# Altium PCB FortRotorV2.1.PcbDoc
Units mm, origin at the board's own origin, x right, y up, seen from the top; angles counter-clockwise.
Board outline 106.31 x 106.31 mm, 2 copper layers (Top Layer, Bottom Layer); 83 components, 69 nets, 283 pads, 174 vias.
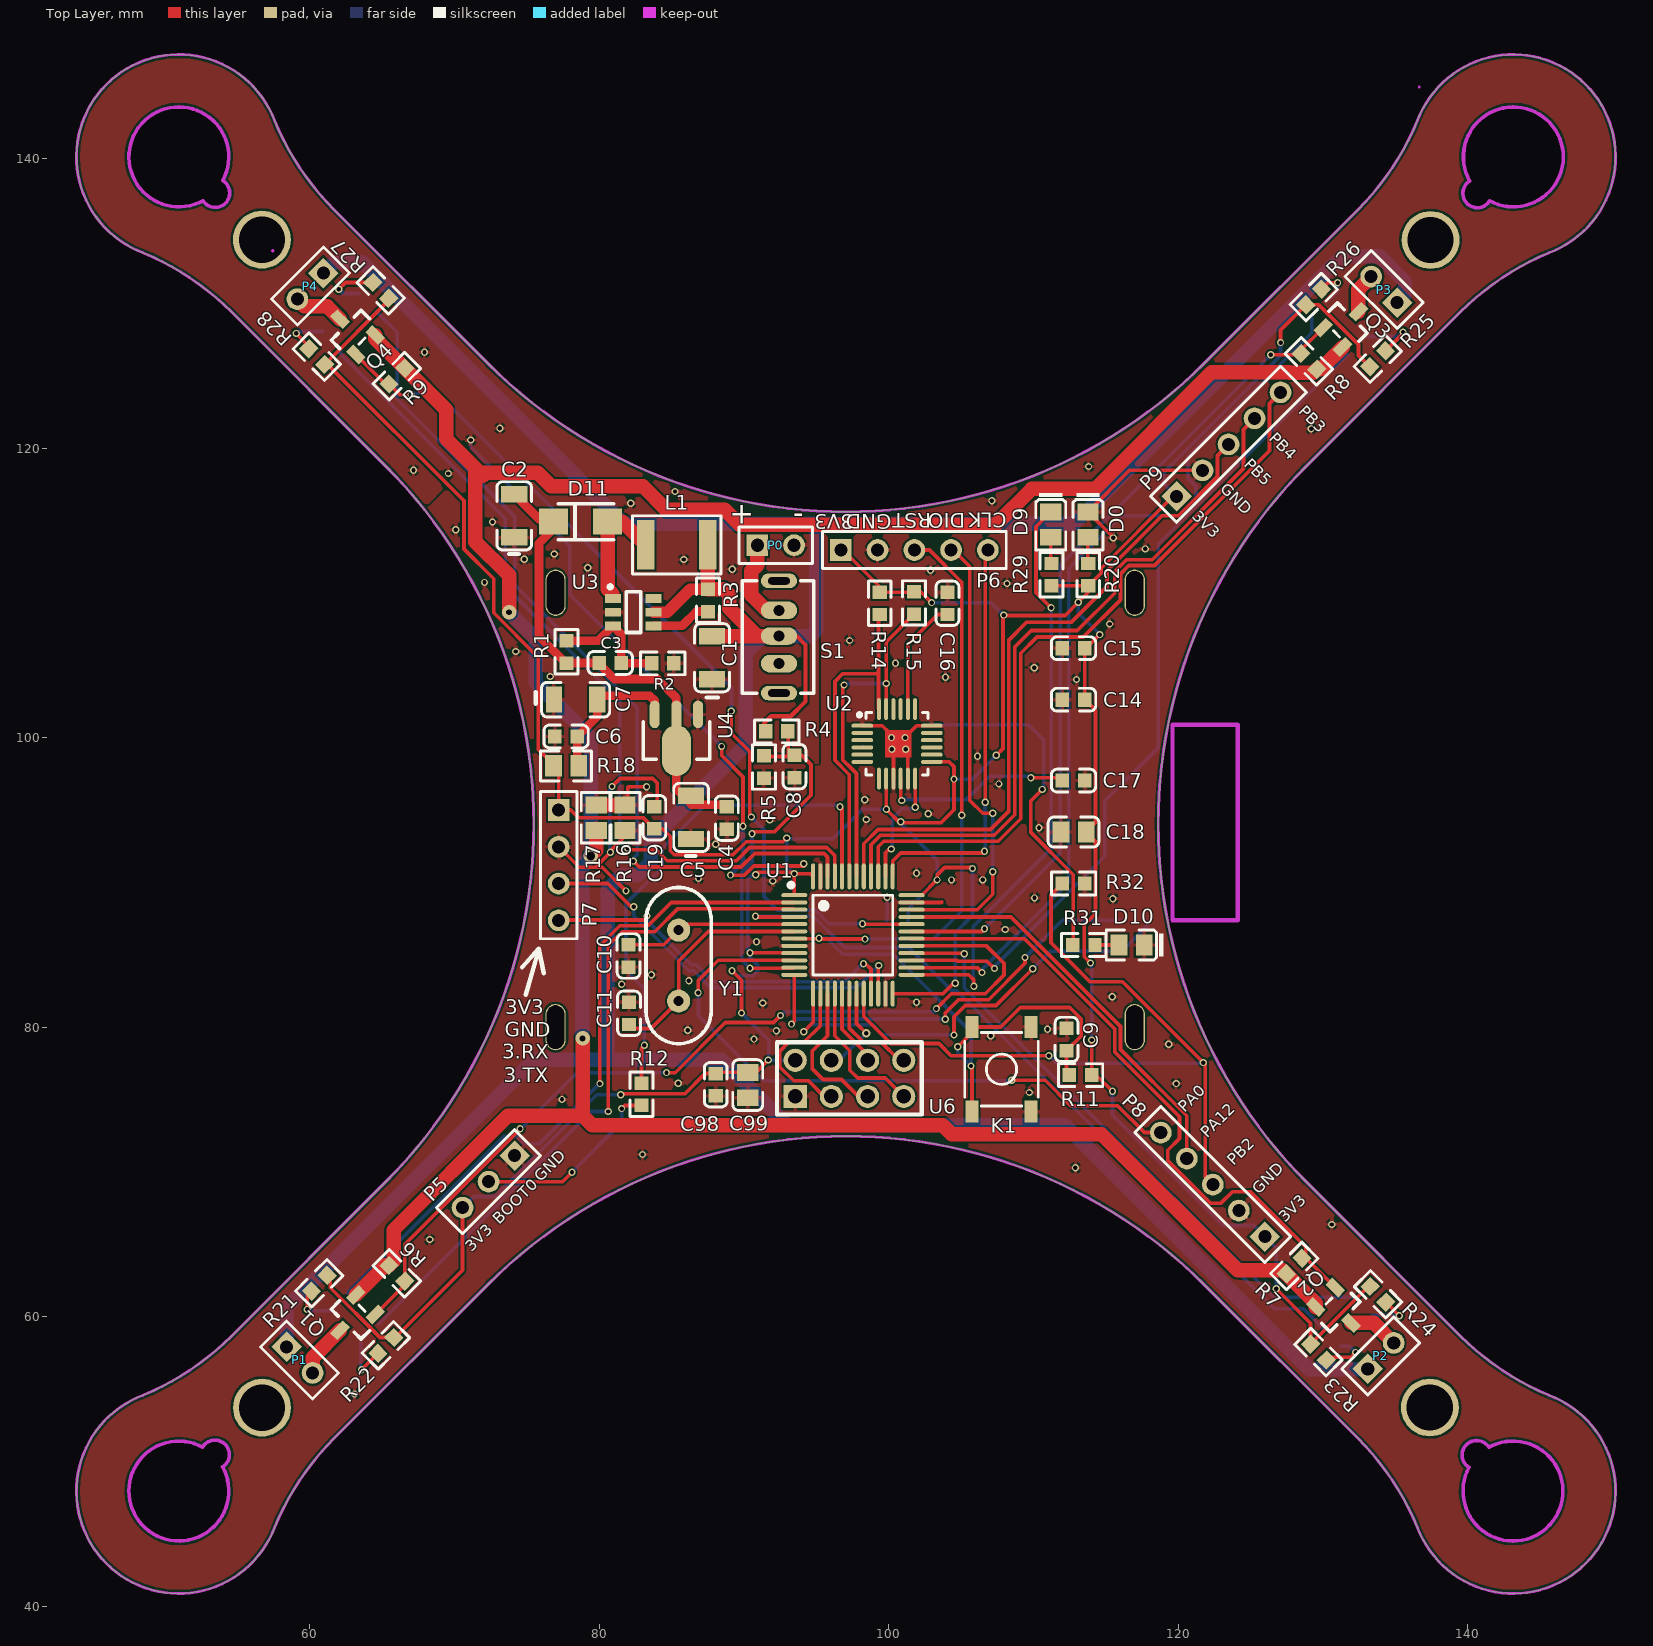
[diagram p0: Top Layer view]
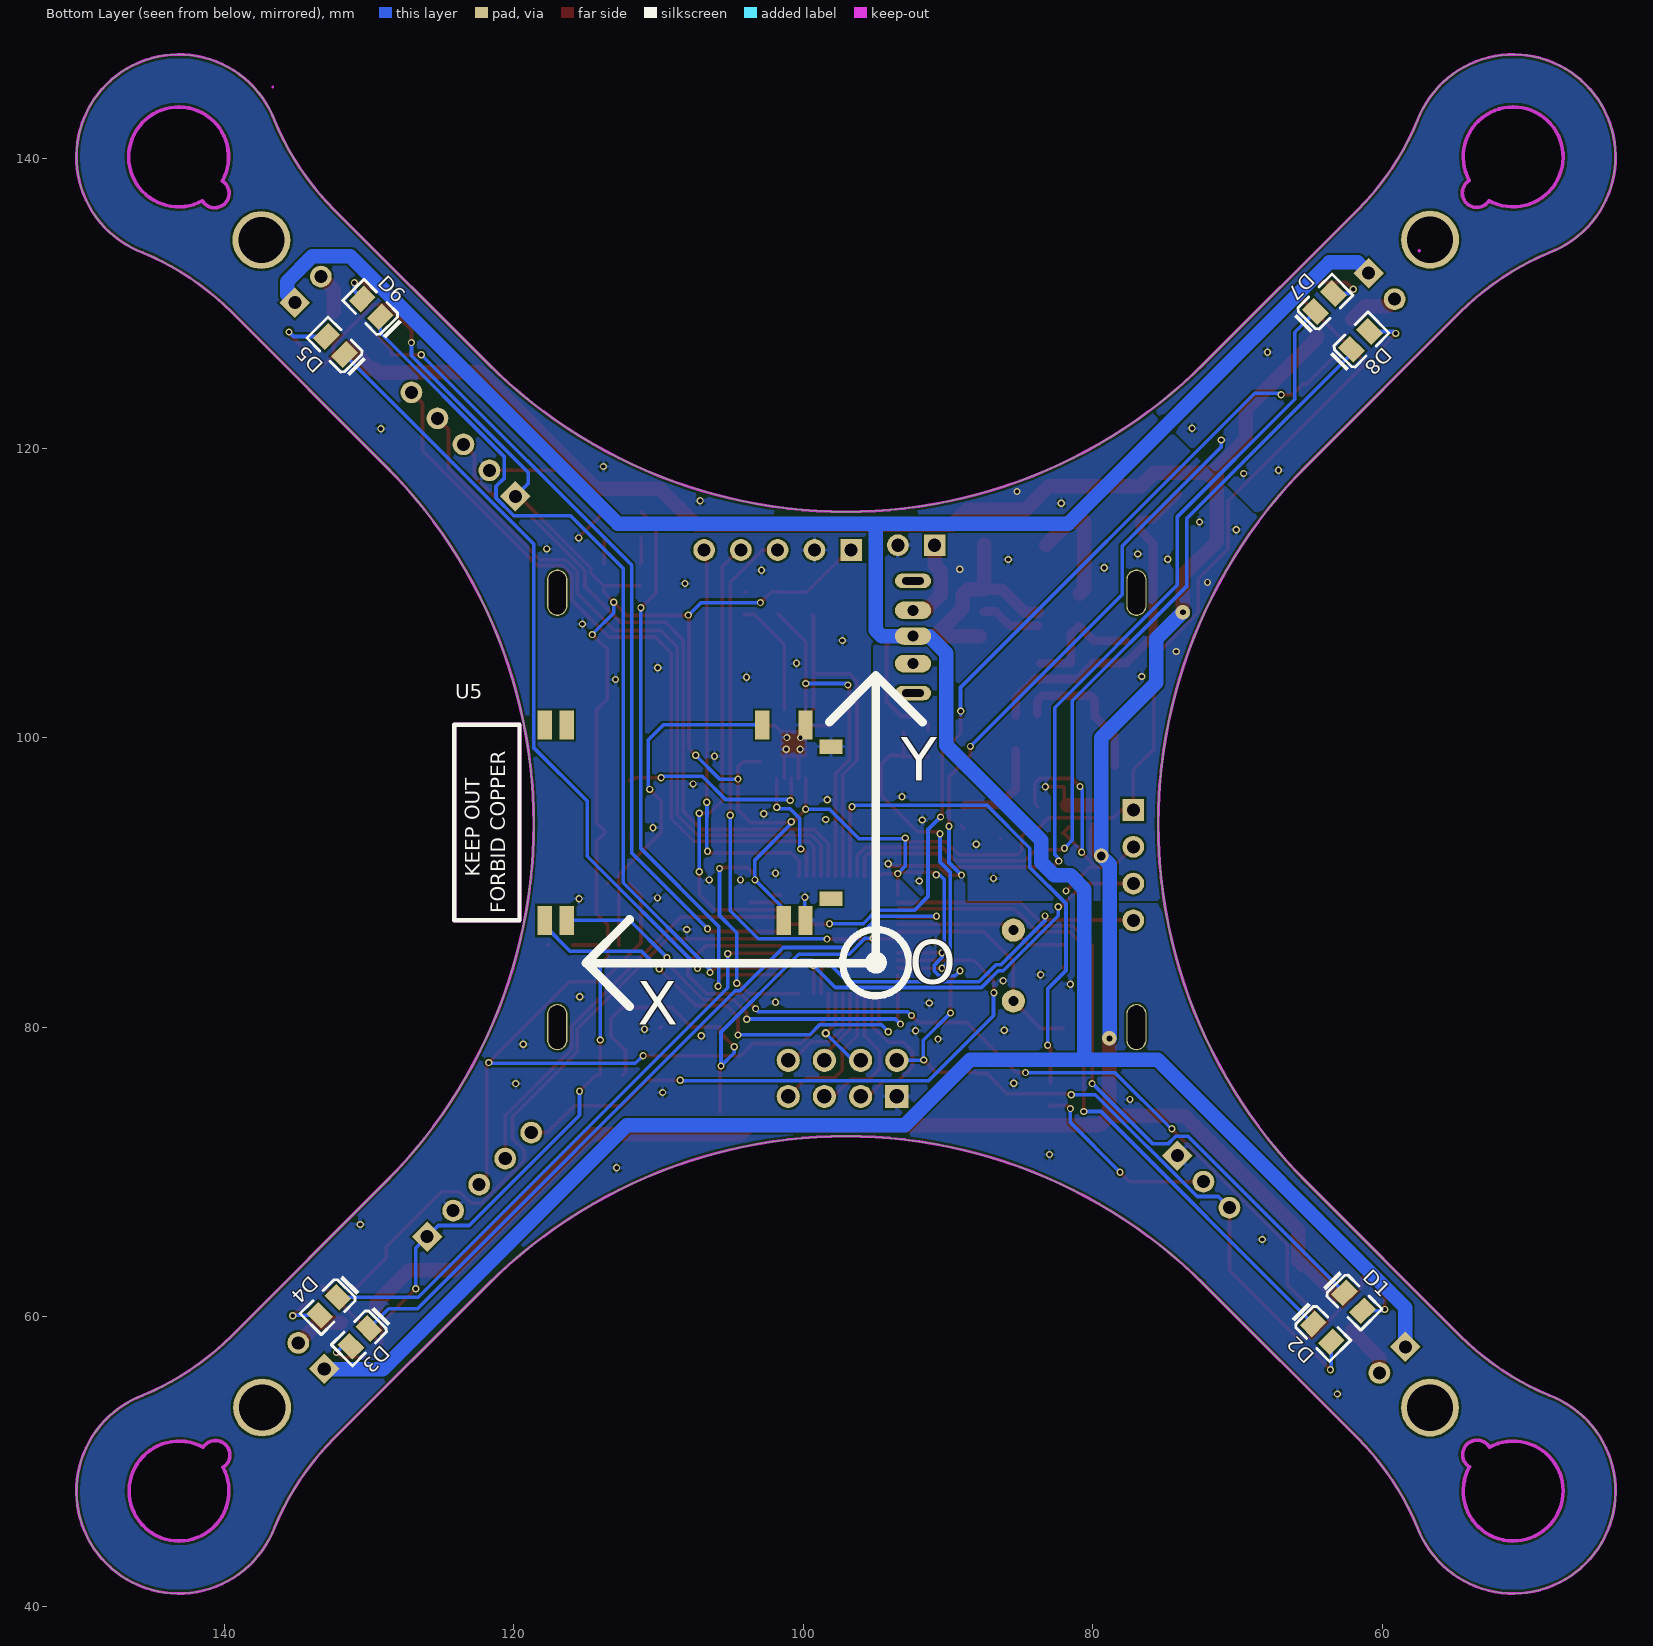
[diagram p1: Bottom Layer view, seen from below]
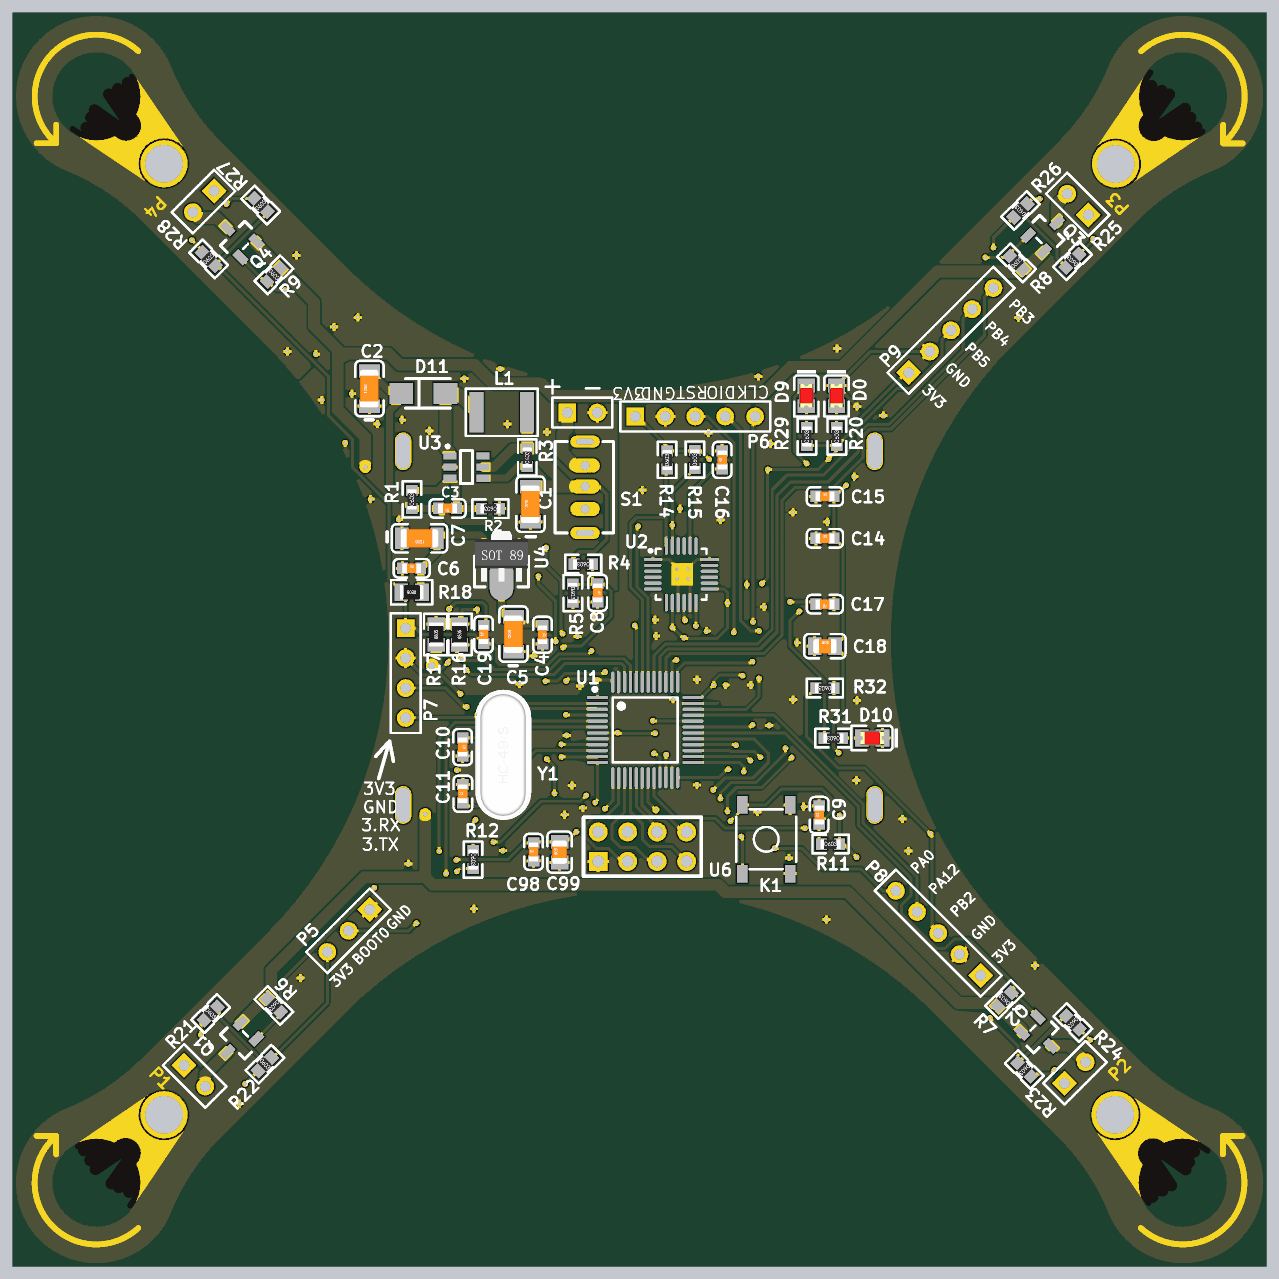
[diagram p2: 3D render of the assembled board from above, using the file's embedded part models]
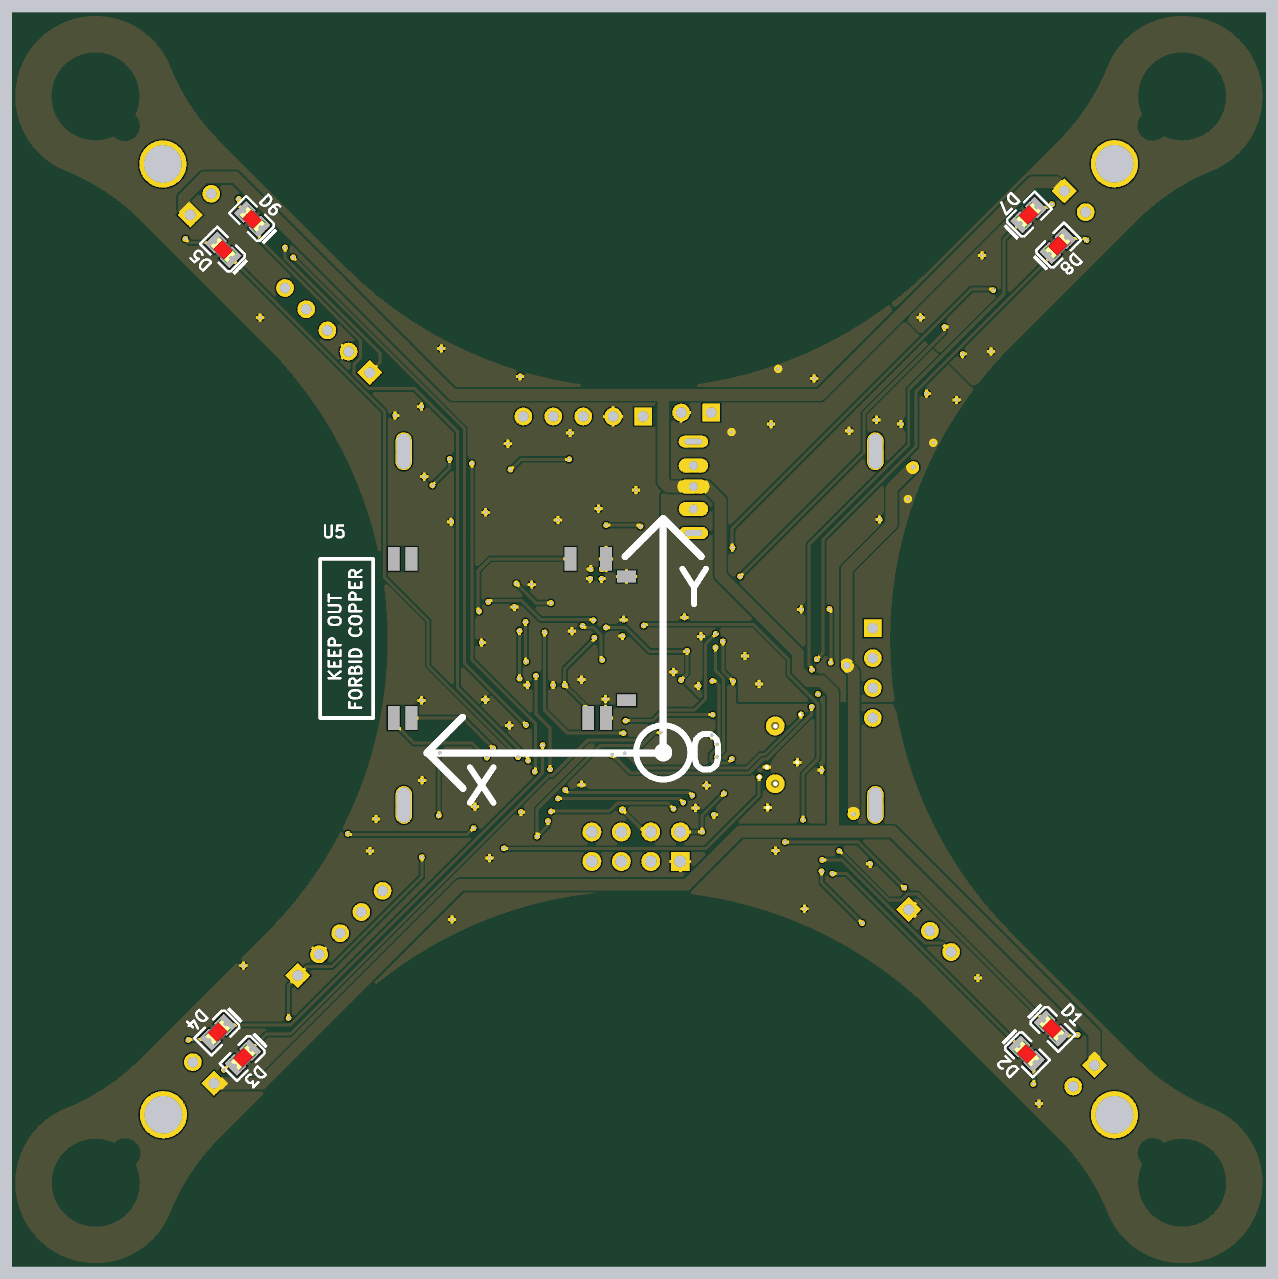
[diagram p3: 3D render of the assembled board from below, using the file's embedded part models]

## Layer stack, top to bottom
Top Layer: signal copper 0.0356
Dielectric: dielectric 0.32, FR-4, Dk 4.8
Bottom Layer: signal copper 0.0356

## Board outline
45.975,42.946 ccw(c50.975,47.946) 57.593,45.455 57.592,45.456 cw(c75.139,38.168) 61.704,51.603 72.31,62.21 cw(c97.059,37.461) 121.808,62.21 132.414,51.603 cw(c118.979,38.168) 136.525,45.458 136.524,45.457 ccw(c143.143,47.946) 148.143,42.946 ccw(c143.143,47.946) 145.633,54.564 145.632,54.562 cw(c152.92,72.109) 139.485,58.674 128.879,69.281 cw(c153.627,94.029) 128.879,118.778 139.485,129.385 cw(c152.92,115.95) 145.63,133.496 145.631,133.494 ccw(c143.143,140.113) 148.143,145.113 ccw(c143.143,140.113) 136.525,142.603 136.526,142.603 cw(c118.979,149.891) 132.414,136.456 121.808,125.849 cw(c97.059,150.598) 72.31,125.849 61.704,136.456 cw(c75.139,149.891) 57.593,142.601 57.594,142.601 ccw(c50.975,140.113) 45.975,145.113 ccw(c50.975,140.113) 48.485,133.495 48.485,133.496 cw(c41.197,115.95) 54.632,129.385 65.239,118.778 cw(c40.49,94.029) 65.239,69.281 54.632,58.674 cw(c41.197,72.109) 48.487,54.563 48.487,54.564 ccw(c50.975,47.946)
cut-out: 52.62,50.989 ccw(c50.978,47.955) 53.995,49.628 53.998,49.623 ccw(c53.467,50.47)
cut-out: 140.092,49.592 cw(c140.614,50.444) 141.462,50.976 141.46,50.974 cw(c143.129,47.955)
cut-out: 52.647,137.087 cw(c50.978,140.106) 54.014,138.468 54.015,138.47 cw(c53.492,137.617)
cut-out: 140.134,138.439 ccw(c140.665,137.592) 141.518,137.069 141.516,137.07 ccw(c143.154,140.106)

## Design rules (kind name [scope] priority, off if disabled: settings)
Clearance [All] p1: gap=0.152
HoleSize [All] p1: absolutevalues=TRUE maxlimit=10 minlimit=0.3 maxpercent=80.000 minpercent=20.000
MinimumSolderMaskSliver [All] p1: minsoldermaskwidth=0.1
PlaneConnect [All] p1: planeconnectstyle=Direct reliefexpansion=0.508 reliefentries=4 reliefconductorwidth=0.254 reliefairgap=0.254
PolygonConnect [All] p1: connectstyle=Relief reliefconductorwidth=0.254 reliefentries=4 polygonreliefangle="90 Angle"
RoutingVias [All] p1: holewidth=0.3 width=0.5 viastyle="Through Hole" minholewidth=0.3 minwidth=0.5 maxholewidth=0.711 maxwidth=1.27
SilkToSilkClearance [All] p1: silktosilkclearance=0
SilkscreenOverComponentPads [All] p1: minsilkscreentomaskgap=0
SolderMaskExpansion [All] p1: expansion=0.102
TestPointUsage [All] p1: valid=0 allowmultiple=FALSE
Testpoint [All] p1: side=15 testpointundercomponent=TRUE minsize=1.016 maxsize=2.54 preferedsize=1.524 minholesize=0 maxholesize=1.016 preferedholesize=0.813 testpointgrid=0.025 style=1023 order=0123456789
Width [All] p1: maxlimit=5.08 minlimit=0.152 preferedwidth=0.254
19 further rules are at their usual default settings.

## Components (designator, comment, footprint, x,y, rotation, side; value= is the part's Value field where it differs from the comment)
C1 "Cap Pol1" LC-1206_C 87.808,105.512 r270 top
C2 "Cap Pol1" LC-1206_C 74.143,115.316 r270 top
C3 "Cap" LC-0603_C 80.772,105.156 r180 top
C4 "Cap" LC-0603_C 88.824,94.437 r90 top
C5 "Cap Pol1" LC-1206_C 86.36,94.488 r270 top
C6 "Cap" LC-0603_C 77.724,100.076 r0 top
C7 "Cap Pol1" LC-1206_C 78.384,102.616 r180 top
C8 "Cap" LC-0603_C 93.497,97.993 r90 top
C9 "1uF" LC-0603_C 112.293,79.146 r270 top
C10 "" LC-0603_C 82.042,84.912 r90 top
C11 "" LC-0603_C 82.067,80.95 r270 top
C14 "" LC-0603_C 112.776,102.616 r0 top
C15 "" LC-0603_C 112.776,106.172 r0 top
C16 "" LC-0603_C 104.064,109.271 r270 top
C17 "" LC-0603_C 112.776,97.028 r180 top
C18 "" LC-0805_C 112.776,93.472 r0 top
C19 "" LC-0603_C 83.82,94.463 r270 top
C98 "1uF" LC-0603_C 88.062,76.022 r270 top
C99 "1uF" LC-0805_C 90.272,75.997 r270 top
D0 "LED0" LC-0805_LED_S1 113.767,114.706 r270 top
D1 "LED0" LC-0805_LED_S1 62.008,61.037 r225 bottom
D2 "LED0" LC-0805_LED_S1 64.163,58.882 r225 bottom
D3 "LED0" LC-0805_LED_S1 130.636,58.568 r315 bottom
D4 "LED0" LC-0805_LED_S1 132.792,60.723 r315 bottom
D5 "LED0" LC-0805_LED_S1 132.32,127.08 r45 bottom
D6 "LED0" LC-0805_LED_S1 129.853,129.678 r45 bottom
D7 "LED0" LC-0805_LED_S1 64.008,130.048 r135 bottom
D8 "LED0" LC-0805_LED_S1 61.519,127.432 r135 bottom
D9 "LED0" LC-0805_LED_S1 111.201,114.706 r270 top
D10 "LED0" LC-0805_LED_S1 116.789,85.674 r180 top
D11 "SS14" LC-DO-214AC 79.096,114.91 r0 top
K1 "SW-DPST" SWITCH2 109.703,74.168 r180 top
L1 "Inductor" LC-1812_L 85.369,113.309 r180 top
P0 "VBAT" HDR1X2 90.932,113.284 r0 top
P1 "M1" HDR1X2 58.42,57.912 r315 top
P2 "M2" HDR1X2 133.096,56.388 r45 top
P3 "M3" HDR1X2 135.128,130.048 r135 top
P4 "M4" HDR1X2 60.96,132.08 r225 top
P5 "BOOT" HDR1X3 74.168,71.12 r225 top
P6 "SWD" HDR1X5 96.698,112.954 r0 top
P7 "USART" HDR1X4 77.216,94.996 r270 top
P8 "Header 5" HDR1X5 125.984,65.532 r135 top
P9 "Header 5" HDR1X5 119.888,116.662 r45 top
Q1 "SI2302" LC-SOT-23(SOT-23-3) 62.992,59.944 r45 top
Q2 "SI2302" LC-SOT-23(SOT-23-3) 131.064,60.452 r135 top
Q3 "SI2302" LC-SOT-23(SOT-23-3) 131.572,128.524 r225 top
Q4 "SI2302" LC-SOT-23(SOT-23-3) 62.992,128.016 r315 top
R1 "Res2" LC-0603_R 77.749,105.918 r270 top
R2 "Res2" LC-0603_R 84.404,105.131 r180 top
R3 "Res2" LC-0603_R 87.528,109.474 r270 top
R4 "Res2" LC-0603_R 92.278,100.432 r180 top
R5 "Res2" LC-0603_R 91.389,97.968 r90 top
R6 "" LC-0603_R 66.04,62.992 r135 top
R7 "" LC-0603_R 128.016,63.5 r225 top
R8 "" LC-0603_R 129.032,125.984 r315 top
R9 "" LC-0603_R 66.04,124.968 r45 top
R11 "10K" LC-0603_R 113.259,76.683 r0 top
R12 "" LC-0603_R 82.931,75.362 r90 top
R14 "" LC-0603_R 99.39,109.271 r270 top
R15 "" LC-0603_R 101.752,109.296 r270 top
R16 "" LC-0805_R 81.788,94.463 r270 top
R17 "" LC-0805_R 79.807,94.463 r270 top
R18 "" LC-0805_R 77.724,98.044 r180 top
R20 "" LC-0603_R 113.792,111.252 r270 top
R21 "" LC-0603_R 60.681,62.306 r45 top
R22 "" LC-0603_R 65.278,58.014 r45 top
R23 "" LC-0603_R 129.692,57.556 r135 top
R24 "" LC-0603_R 133.807,61.544 r135 top
R25 "" LC-0603_R 133.782,126.162 r225 top
R26 "" LC-0603_R 129.362,130.429 r225 top
R27 "" LC-0603_R 64.922,130.886 r315 top
R28 "" LC-0603_R 60.503,126.314 r315 top
R29 "" LC-0603_R 111.252,111.252 r270 top
R31 "" LC-0603_R 113.487,85.674 r180 top
R32 "" LC-0603_R 112.776,89.916 r180 top
S1 "SWITCH" SWITCH_6 92.431,110.82 r0 top
U1 "STM32F103C8T6" LC-LQFP-48_7x7x05P 97.536,86.36 r270 top
U2 "MPU6050" LC-QFN-24_4X4X05P 100.584,99.568 r270 top
U3 "SX1308" LC-SOT-23-6 82.372,108.661 r180 top
U4 "HT7833" LC-SOT-89(SOT-89-3) 85.344,101.6 r90 top
U5 "SPP-C" SPP-C 117.856,87.376 r90 bottom
U6 "NRF24L01" LC-HDR2X4H 93.548,75.209 r90 top
Y1 "" LC-HC-49S 85.496,84.252 r270 top

## Footprints (in the part's own frame and the unit in brackets; to place one, negate y for a bottom-side part, rotate by r counter-clockwise, add the part's x,y. Pads: shape width x height; smd on the part's side, far side on the other; paste and mask are expansions set on the pad)
HDR1X2 [mm] "Connector; Header; 2 Position"
  rect 1.5x1.5 hole 0.9: 1(0,0)
  round 1.5 hole 0.9: 2(2.54,0)
  silkscreen extent -1.27,-1.27 3.81,1.27
HDR1X3 [mm] "Connector; Header; 3 Position"
  rect 1.5x1.5 hole 0.9: 1(0,0)
  round 1.5 hole 0.9: 2(2.54,0) 3(5.08,0)
  silkscreen extent -1.27,-1.27 6.35,1.27
HDR1X4 [mm] "Connector; Header; 4 Position"
  rect 1.5x1.5 hole 0.9: 1(0,0)
  round 1.5 hole 0.9: 2(2.54,0) 3(5.08,0) 4(7.62,0)
  silkscreen extent -1.27,-1.27 8.89,1.27
HDR1X5 [mm] "Connector; Header; 5 Position"
  rect 1.5x1.5 hole 0.9: 1(0,0)
  round 1.5 hole 0.9: 2(2.54,0) 3(5.08,0) 4(7.62,0) 5(10.16,0)
  silkscreen extent -1.27,-1.27 11.43,1.27
LC-0603_C [mm]
  rect 0.93x0.98 smd: 1(-0.77,0) 2(0.77,0)
  silkscreen extent -1.53,-0.79 1.54,0.79, body extent -0.8,-0.4 0.8,0.4, height 0.3
LC-0603_R [mm]
  rect 0.93x0.98 smd: 1(-0.77,0) 2(0.77,0)
  silkscreen extent -1.53,-0.79 1.54,0.79, body extent -0.85,-0.4 0.85,0.4, height 0.56
LC-0805_C [mm]
  rect 1.16x1.47 smd: 1(-0.875,0) 2(0.875,0)
  silkscreen extent -1.76,-1.04 1.76,1.04, body extent -1,-0.62 1,0.63, height 0.77
LC-0805_LED_S1 [mm]
  rect 1.16x1.47 smd: 1(0.875,0) 2(-0.875,0)
  silkscreen extent -2.2,-1.04 1.76,1.03, body extent -1.01,-0.62 1.01,0.62, height 1.1
LC-0805_R [mm]
  rect 1.16x1.47 smd: 1(-0.875,0) 2(0.875,0)
  silkscreen extent -1.76,-1.04 1.76,1.03, body extent -1,-0.62 1,0.63, height 0.49
LC-1206_C [mm]
  rect 1.13x1.8 smd: 1(-1.49,0) 2(1.49,0)
  silkscreen extent -2.36,-1.2 2.35,1.2, body extent -1.6,-0.81 1.6,0.79, height 1
LC-1812_L [mm]
  rect 1.2x3.42 smd: 1(-2.15,0) 2(2.15,0)
  silkscreen extent -3.05,-2.01 3.05,2.01
LC-DO-214AC [mm]
  rect 2x1.8 smd: 1(1.5,0) 2(-2.25,0)
  silkscreen extent -1.9,-1.25 1.9,1.25
LC-HC-49S [mm]
  round 1.6 hole 0.7: 1(-2.45,0) 2(2.45,0)
  silkscreen extent -5.39,-2.25 5.39,2.25, body extent -5.39,-2.27 5.41,2.23, height 3.6
LC-HDR2X4H [mm]
  rect 1.6x1.6 hole 1: 1(0,0)
  round 1.6 hole 1: 2(2.5,0) 3(0,-2.5) 4(2.5,-2.5) 5(0,-5) 6(2.5,-5) 7(0,-7.5) 8(2.5,-7.5)
  silkscreen extent -1.25,-8.75 3.75,1.25
LC-LQFP-48_7x7x05P [mm]
  oval 0.28x1.8 smd mask+0.051: 1(-2.75,-4.05) 2(-2.25,-4.05) 3(-1.75,-4.05) 4(-1.25,-4.05) 5(-0.75,-4.05) 6(-0.25,-4.05) 7(0.25,-4.05) 8(0.75,-4.05) 9(1.25,-4.05) 10(1.75,-4.05) 11(2.25,-4.05) 12(2.75,-4.05) 25(2.75,4.05) 26(2.25,4.05) 27(1.75,4.05) 28(1.25,4.05) 29(0.75,4.05) 30(0.25,4.05) 31(-0.25,4.05) 32(-0.75,4.05) 33(-1.25,4.05) 34(-1.75,4.05) 35(-2.25,4.05) 36(-2.75,4.05)
  oval 1.8x0.28 smd mask+0.051: 13(4.05,-2.75) 14(4.05,-2.25) 15(4.05,-1.75) 16(4.05,-1.25) 17(4.05,-0.75) 18(4.05,-0.25) 19(4.05,0.25) 20(4.05,0.75) 21(4.05,1.25) 22(4.05,1.75) 23(4.05,2.25) 24(4.05,2.75) 37(-4.05,2.75) 38(-4.05,2.25) 39(-4.05,1.75) 40(-4.05,1.25) 41(-4.05,0.75) 42(-4.05,0.25) 43(-4.05,-0.25) 44(-4.05,-0.75) 45(-4.05,-1.25) 46(-4.05,-1.75) 47(-4.05,-2.25) 48(-4.05,-2.75)
  silkscreen extent -3.6,-4.42 2.75,2.75
LC-QFN-24_4X4X05P [mm]
  oval 0.28x1.5 smd mask+0.051: 1(-1.25,-2.4) 2(-0.75,-2.4) 3(-0.25,-2.4) 4(0.25,-2.4) 5(0.75,-2.4) 6(1.25,-2.4) 13(1.25,2.4) 14(0.75,2.4) 15(0.25,2.4) 16(-0.25,2.4) 17(-0.75,2.4) 18(-1.25,2.4)
  oval 1.5x0.28 smd mask+0.051: 7(2.4,-1.25) 8(2.4,-0.75) 9(2.4,-0.25) 10(2.4,0.25) 11(2.4,0.75) 12(2.4,1.25) 19(-2.4,1.25) 20(-2.4,0.75) 21(-2.4,0.25) 22(-2.4,-0.25) 23(-2.4,-0.75) 24(-2.4,-1.25)
  silkscreen extent -2.15,-2.72 2.15,2.15
LC-SOT-23(SOT-23-3) [mm]
  rect 1.25x0.7 smd: 1(1.25,-0.95) 2(1.25,0.95) 3(-1.25,0)
  silkscreen extent -0.65,-1.46 0.9,1.46
LC-SOT-23-6 [mm]
  rect 1.1x0.6 smd: 1(1.4,-0.95) 2(1.4,0) 3(1.4,0.95) 4(-1.4,0.95) 5(-1.4,0) 6(-1.4,-0.95)
  silkscreen extent -0.5,-1.87 1.72,1.4
LC-SOT-89(SOT-89-3) [mm]
  oval 1.9x0.7 smd: 1(0,-1.5) 3(0,1.5)
  oval 3.5x2 smd: 2(-2.5,0)
  oval 2.1x0.7 smd: 2(-0.1,0)
  silkscreen extent -3.1,-2.3 -0.5,2.3, body extent -3.75,-2.25 0.55,2.25, height 1.51
SPP-C [mm]
  rect 2x1 smd: 1(0,0) 2(0,-1.5) 12(0,-16.5) 13(0,-18) 22(13.5,-18) 24(13.5,-15) 33(13.5,-1.5) 34(13.5,0)
  rect 1x1.6 smd: 14(1.5,-19.75) 21(12,-19.75)
  Keep-Out Layer lines w0.3: 0,1.75 13.5,1.75 13.5,6.25 0,6.25 0,1.75
  silkscreen extent 0,1.75 13.5,6.25
SWITCH2 [mm]
  rect 0.9x1.5 smd: 1(-0.127,-5.842) 2(3.937,-5.842) 3(3.937,0) 4(-0.127,0)
  silkscreen extent -0.63,-5.46 4.45,-0.38
SWITCH_6 [mm]
  oval 2.5x1.2 hole 0.75: 1(0,-2.032) 2(0,-3.81) 3(0,-5.715)
  oval 2.5x1 hole 0.5 slot 1.5 at 0 deg: ""(0,-7.747) ""(0,0)
  silkscreen extent -2.54,-7.75 2.41,0

## Part data
C1 C2 C5 C7: "Polarized Capacitor (Radial)"
C3 C4 C6 C8: "Capacitor"
C9 C98 C99: library part C_1
C10 C11 C18 C19: library part C
C14 C15 C16 C17: library part Cap, "Capacitor"
D0 D1 D2 D3 D4 D5 D6 D7 D8 D9 D10: "Typical INFRARED GaAs LED"
D11: library part "Diode 1N4001", "1 Amp General Purpose Rectifier"
K1: "Double-Pole, Single-Throw Switch"
P0 P1 P2 P3 P4: library part "Header 2", "Header, 2-Pin"
P5: library part "Header 3", "Header, 3-Pin"
P6: library part "Header 5", "Header, 5-Pin"
P7: library part "Header 4", "Header, 4-Pin"
P8 P9: "Header, 5-Pin"
Q1 Q2 Q3 Q4: library part NMOS-2, "N-Channel Power MOSFET"
R1 R2 R3 R4 R5: "Resistor"
R6 R7 R8 R9 R12 R16 R17 R18 R32: library part R
R11 R14 R15 R20 R21 R22 R23 R24 R25 R26 R27 R28 R29 R31: library part R_1
U1: "STM32 ARM-based 32-bit MCU with 64 Kbytes Flash, 48-pin LQFP, Industrial Temperature"
U2: "9轴运动处理传感器"
U6: library part "Header 4X2H", "Header, 4-Pin, Dual row, Right Angle"
Y1: library part XTAL, "Crystal Oscillator"

## Free pads (board coordinates)
  round 4 hole 3.2: 5(56.718,134.388) 6(56.721,53.72) 7(137.436,134.367) 8(137.389,53.724)
  oval 1.4x3.2 hole 1.2 slot 3 at 90 deg: 12(77,80) 12(77,110) 12(117,80) 12(117,110)

## Via types
v1: diameter 0.5, hole 0.3, Top Layer to Bottom Layer, 170 vias
v2: diameter 1, hole 0.4, Top Layer to Bottom Layer, 2 vias
v3: diameter 1, hole 0.6, Top Layer to Bottom Layer, 1 vias
v4: diameter 0.6, hole 0.3, Top Layer to Bottom Layer, 1 vias

## Nets (pads, with @x,y where several pads share a name; then routed paths per layer and width w, separated by ;. In a path a pad name is that pad's centre, name@x,y a point inside that pad or via, vN(x,y) a via of type N, cw(c..) or ccw(c..) an arc to the next point about the centre after c; other vN are vias at no path point)
AGND: Q1.2 Q2.2 Q3.2 Q4.2 R6.2 R7.2 R8.2 R9.2 R17.2 | length 207.7
  Top Layer w1: Q1.2 65.241,63.536 R6.2 65.805,63.846 65.805,65.983 73.699,73.877 78.879,73.877 ; Q4.2 64.548,127.549 R9.2 69.444,122.653 69.444,120.625 71.984,118.085 ; v2(73.787,108.661) 73.787,111.201 71.45,113.538 71.45,118.288 75.768,118.288 76.708,117.348 83.038,117.348 84.647,115.738 88.681,115.738 89.733,114.686 107.397,114.686 109.882,117.172 114.255,117.172 122.332,125.249 127.653,125.249 127.701,125.201 129.338,125.201 R8.2 129.831,125.44 Q3.2 ; v2@78.879,79.223 78.879,73.877 ; v3(79.426,91.821) 79.807,92.202 R17.2 R17.2@79.807,93.693 ; Q2.2 129.508,60.919 R7.2 127.233,63.194 124.105,63.194 114.706,72.593 104.37,72.593 103.735,73.228 79.527,73.228 78.879,73.877
  Bottom Layer w1: v2@73.787,108.61 v2(73.787,108.661) 75.628,106.82 75.628,103.792 79.426,99.994 79.426,95.352 v3(79.426,91.821) 78.842,91.237 v2@78.842,79.223
  other v2: 78.867,79.223
BOOT0: R12.2 U1.44 | length 36.3
  Top Layer w0.254: R12.2 82.931,78.537 v1(83.134,78.74) ; v1(96.647,95.225) 96.786,95.086 U1.44
  Bottom Layer w0.254: v1(83.134,78.74) 83.134,82.637 81.868,83.903 81.868,88.535 84.359,91.026 84.359,92.36 87.325,95.326 96.545,95.326 v1(96.647,95.225)
BOOT1: P8.3 R32.2 U1.20 | length 53.5
  Top Layer w0.254: U1.20 98.286,80.733 100.148,78.871 103.476,78.871 104.318,78.029 v1(111.074,78.029) ; R32.2 111.213,89.123 111.213,85.829 113.907,83.134 116.151,83.134 121.869,77.416 121.869,69.647 P8.3
  Bottom Layer w0.254: v1(111.074,78.029) 111.608,77.495 121.684,77.495 v1(121.737,77.548)
DGND: C9.1 C10.1 C11.1 C14.1 C15.1 C16.1 C17.1 C18.1 C19.1 C98.2 C99.2 D0.2 D10.2 K1.1 K1.4 P5.1 P6.2 P7.2 P8.2 P9.2 R16.2 R32.1 U1.8 U1.23 U1.35 U1.47 U2.1 U2.9 U2.11 U2.18 U5.13 U5.21 U5.22 U6.1 | length 88.8
  Top Layer w0.254: P7.2 78.63,91.042 79.749,91.042 ; v1(80.899,96.622) 81.454,97.176 83.709,97.176 84.019,96.866 84.019,95.432 C19.1 ; R16.2@81.653,93.828 82.094,93.387 81.995,93.387 80.785,92.176 v1(80.785,92.078) 79.749,91.042 ; v1(81.864,89.408) 80.231,91.042 79.749,91.042 ; C10.1 C10.1@82.067,84.117 ; v1@82.982,71.12 v1@83.033,71.171 ; v1(86.208,83.21) v1@86.233,83.185 ; v1(88.468,99.39) 88.468,98.755 89.941,97.282 v1(89.941,93.878) ; v1(89.078,90.5) 90.056,90.5 90.687,91.131 v1@94.154,91.131 ; U6.1 U6.1@93.548,75.602 ; U2.1 99.563,100.818 100.025,100.355 ; P6.2@99.06,113.284 P6.2@99.53,112.814 ; U2.9 100.334,98.759 100.381,98.806 ; U2.11 101.334,98.704 ; 101.409,100.292 101.936,100.818 U2.18 U2.18@102.955,100.847 ; U1.35 103.647,88.61 103.683,88.646 ; C16.1@103.98,110.041 C16.1 ; K1.1 K1.1@109.923,79.916 ; C18.1@111.901,92.874 C18.1 ; R32.1@113.513,89.949 R32.1 ; v1(115.519,113.792) 115.519,113.829 D0.2 116.643,118.458 P9.2 ; D10.2@117.624,85.674 D10.2 ; P8.2@123.828,67.688 P8.2
  Bottom Layer w0.254: v1(71.145,120.548) 71.145,120.066 77.979,113.232 77.979,109.879 v1(88.468,99.39) ; v1(80.785,92.078) 80.747,92.116 80.747,96.418 80.899,96.571 v1(80.899,96.622) ; v1@88.951,90.475 89.027,90.551 89.052,90.551 89.078,90.526 v1(89.078,90.5) 89.941,91.364 v1(89.941,93.878) ; U5.21 U5.21@98.356,99.376 ; U5.13 99.898,87.418 v1(99.898,88.976) ; v1(106.502,90.17) v1@106.531,90.199 ; v1(112.979,104.013) v1@113.005,104.013
  other v1: 63.119,54.661 68.301,65.329 130.607,66.37 112.903,70.282 83.007,71.196 77.445,75.006 109.728,75.489 119.863,76.098 85.471,76.124 119.355,78.816 90.703,79.172 107.061,79.4 92.253,79.756 86.131,79.781 110.973,79.858 91.313,81.661 101.93,81.712 115.443,82.093 81.559,82.956 83.617,83.617 90.881,85.903 108.052,86.741 115.494,88.875 110.084,88.925 104.343,90.17 101.93,90.627 94.132,91.288 110.388,93.777 98.45,94.336 102.743,94.742 98.349,95.707 107.62,96.799 106.147,98.704 100.23,99.189 101.192,99.189 100.205,99.998 101.141,99.998 103.937,104.165 110.058,104.826 100.482,105.131 97.307,106.705 115.265,107.848 108.179,110.642 102.895,111.557 117.729,113.03 107.137,116.357 69.596,118.237 67.183,118.466 113.817,118.72 129.184,121.336 73.152,121.361 67.945,126.619
GND: C1.2 C2.2 C4.1 C5.2 C6.1 C7.2 C8.1 P0.2 R2.1 R5.1 R16.1 R17.1 U3.2 U4.1 | length 5.3
  Top Layer w0.254: R16.1 81.991,95.541 81.991,96.545 82.042,96.596 v1(83.287,96.596) ; C5.2 C5.2@86.369,92.998 ; C4.1@88.9,93.718 C4.1@89.086,93.904
  Top Layer w1: R17.1 R16.1
  Bottom Layer w0.254: P0.2@92.991,113.284 P0.2
  other v1: 91.999,90.094 86.868,90.272 88.062,92.634 91.796,94.31 93.193,95.91 76.632,104.216 74.244,105.943 72.085,110.719 89.205,111.633 79.223,111.735 85.852,112.293 74.828,112.319 76.911,112.674 70.104,114.351 72.644,114.884 82.194,116.18 85.242,116.992
INT: U1.38 U2.12 | length 8.1
  Top Layer w0.254: U1.38 99.786,92.039 100.051,92.304 v1(100.178,92.304) ; v1(101.834,95.194) U2.12
  Bottom Layer w0.254: v1(100.178,92.304) 100.254,92.38 100.254,94.412 100.914,95.072 101.712,95.072 v1(101.834,95.194)
LED1: D1.2 U1.2 | length 48
  Top Layer w0.254: v1(80.061,76.098) 80.061,85.626 81.43,86.995 83.375,86.995 84.99,88.61 U1.2
  Bottom Layer w0.254: D1.2 73.431,72.46 74.284,72.46 74.811,71.933 75.862,71.933 80.027,76.098 v1(80.061,76.098)
LED2: D2.2 U1.3 | length 47.3
  Top Layer w0.254: v1(80.645,74.168) 80.645,85.635 81.598,86.589 83.857,86.589 85.453,88.185 93.411,88.185 U1.3
  Bottom Layer w0.254: D2.2 79.449,74.168 v1(80.645,74.168)
LED3: D3.2 U1.4 | length 53.7
  Top Layer w0.254: v1(90.805,87.655) 90.85,87.61 U1.4
  Bottom Layer w0.254: v1(90.805,87.655) 94.793,87.655 96.952,85.496 101.385,85.496 104.378,82.503 104.707,82.503 126.656,60.554 128.651,60.554 D3.2
LED4: D4.2 U1.28 | length 41.8
  Top Layer w0.254: U1.28 105.183,85.11 v1(105.223,85.07)
  Bottom Layer w0.254: v1(105.223,85.07) 105.223,82.725 126.606,61.342 D4.2
LED5: D5.2 U1.27 | length 58.5
  Top Layer w0.254: U1.27 104.721,84.61 104.791,84.541 106.823,84.541 v1(107.315,84.049)
  Bottom Layer w0.254: v1(107.315,84.049) 107.315,84.18 114.935,91.8 114.935,95.613 118.635,99.314 118.635,113.379 131.701,126.445 D5.2
LED6: D6.2 U1.26 | length 62.5
  Top Layer w0.254: U1.26 106.111,84.11 v1(106.451,83.769)
  Bottom Layer w0.254: v1(106.451,83.769) 106.451,83.972 112.446,89.967 112.446,111.684 116.084,115.322 120.004,115.322 121.228,116.546 121.228,117.351 120.655,117.925 120.655,119.382 129.234,127.961 D6.2
LED7: D7.2 U1.46 | length 60.9
  Top Layer w0.254: v1(82.372,91.465) 82.779,91.059 89.814,91.059 90.751,91.996 95.532,91.996 95.786,91.742 U1.46
  Bottom Layer w0.254: D7.2 66.069,127.987 66.069,123.364 74.168,115.265 74.168,110.547 82.648,102.067 82.648,91.919 82.372,91.643 v1(82.372,91.465)
LED8: D8.2 U1.45 | length 59.4
  Top Layer w0.254: v1(81.971,92.36) 82.078,92.253 83.947,92.253 84.709,91.491 89.488,91.491 90.4,92.402 95.736,92.402 96.286,91.852 U1.45
  Bottom Layer w0.254: D8.2 62.138,126.506 73.533,115.11 73.533,110.439 81.432,102.54 81.432,92.898 v1(81.971,92.36)
LEDUSER: D9.2 U1.25 | length 40.7
  Top Layer w0.254: U1.25 105.544,83.61 105.893,83.261 v1(105.893,82.829) ; D9.2 110.187,114.567 110.187,110.006 v1(111.227,108.966)
  Bottom Layer w0.254: v1(105.893,82.829) 105.842,82.88 105.842,86.944 111.227,92.329 v1(111.227,108.966)
NetC3_1: C3.1 R1.1 R2.2 U3.3 | length 8.5
  Top Layer w0.6: R1.1 79.949,106.688 U3.3 81.542,107.141 C3.1 81.567,105.131 R2.2
NetC6_2: C6.2 C7.1 R18.1 U4.3 | length 10.5
  Top Layer w0.6: R18.1@78.494,98.044 C6.2 ; C6.2@78.599,100.181 C6.2 ; U4.3 83.844,102.541 83.49,102.895 80.154,102.895 C7.1 79.874,101.456 C6.2
NetC16_2: C16.2 U2.20 | length 8.1
  Top Layer w0.254: U2.20 101.334,106.439 103.395,108.501 C16.2
NetC17_2: C17.2 U2.10 | length 13.5
  Top Layer w0.254: U2.10 100.834,95.737 v1(100.914,95.656) ; v1(109.83,97.231) 111.621,97.231 111.824,97.028 C17.2
  Bottom Layer w0.254: v1(100.914,95.656) 100.981,95.723 105.375,95.723 106.981,97.329 109.732,97.329 v1(109.83,97.231)
NetD0_1: D0.1 R20.1 | length 1.8
  Top Layer w0.254: D0.1 113.767,112.047 R20.1
NetD1_1: D1.1 R21.1 | length 3.1
  Top Layer w0.254: v1(59.842,60.503) 59.842,61.468 59.933,61.559 R21.1@60.339,61.559
  Bottom Layer w0.254: v1(59.842,60.503) 59.927,60.418 D1.1
NetD2_1: D2.1 R22.1 | length 3.6
  Top Layer w0.254: v1(63.602,56.337) R22.1
  Bottom Layer w0.254: D2.1 63.544,56.395 v1(63.602,56.337)
NetD3_1: D3.1 R23.1 | length 3.3
  Top Layer w0.254: R23.1@130.237,57.19 131.917,57.19 v1(132.258,57.531)
  Bottom Layer w0.254: D3.1 131.84,57.949 v1(132.258,57.531)
NetD4_1: D4.1 R24.1 | length 3.2
  Top Layer w0.254: R24.1 v1(135.28,60.071)
  Bottom Layer w0.254: D4.1 135.247,60.104 v1(135.28,60.071)
NetD5_1: D5.1 R25.1 | length 4.5
  Top Layer w0.254: R25.1 135.534,127.914 v1(135.534,128.016)
  Bottom Layer w0.254: D5.1 135.217,127.699 v1(135.534,128.016)
NetD6_1: D6.1 R26.1 | length 2.7
  Top Layer w0.254: R26.1 130.353,131.42 v1(131.013,131.42) v1@130.988,131.42
  Bottom Layer w0.254: D6.1 131.013,130.838 v1(131.013,131.42)
NetD7_1: D7.1 R27.1 | length 4
  Top Layer w0.254: v1(62.027,130.962) 62.495,131.431 R27.1
  Bottom Layer w0.254: v1(62.027,130.962) 62.322,130.667 D7.1
NetD8_1: D8.1 R28.1 | length 3.3
  Top Layer w0.254: v1(59.08,127.914) 59.958,127.036 R28.1
  Bottom Layer w0.254: v1(59.08,127.914) 59.217,128.051 D8.1
NetD9_1: D9.1 R29.1 | length 1.8
  Top Layer w0.254: D9.1 111.201,112.073 R29.1
NetD10_1: D10.1 R31.1 | length 1.7
  Top Layer w0.254: R31.1 D10.1
NetD11_1: D11.1 L1.2 U3.1 | length 8.4
  Top Layer w1: 80.924,109.931 80.596,110.26 D11.1 81.619,114.91 L1.2
NetP1_2: P1.2 Q1.3 | length 3.7
  Top Layer w1: P1.2 60.216,57.168 Q1.3
NetP2_2: P2.2 Q2.3 | length 3.5
  Top Layer w1: Q2.3 133.508,59.568 P2.2
NetP3_2: P3.2 Q3.3 | length 2.8
  Top Layer w1: Q3.3 132.456,130.968 P3.2
NetP4_2: P4.2 Q4.3 | length 3.5
  Top Layer w1: P4.2 59.654,129.794 61.214,129.794 Q4.3
NetP5_2: P5.2 R12.1 | length 13.4
  Top Layer w0.254: P5.2 77.477,69.324 v1(78.13,69.977) ; v1(81.559,74.371) 81.78,74.592 R12.1 R12.1@82.974,74.549
  Bottom Layer w0.254: v1(78.13,69.977) 81.559,73.406 v1(81.559,74.371)
NetR3_2: R3.2 U3.4 | length 4.2
  Top Layer w0.6: U3.4 83.782,107.721 85.75,107.721 86.733,108.704 R3.2
NRF_CE: U1.14 U6.3 | length 11.3
  Top Layer w0.254: U1.14 95.286,80.085 94.148,78.947 93.095,78.947 92.469,78.321 92.469,77.262 93.442,76.289 94.464,76.289 95.543,75.209 U6.3
NRF_CSN: U1.19 U6.4 | length 6.2
  Top Layer w0.254: U1.19 97.786,80.243 v4(98.45,79.578)
  Bottom Layer w0.254: U6.4 96.582,77.709 v4(98.45,79.578)
NRF_IRQ: U1.18 U6.8 | length 7.1
  Top Layer w0.254: U1.18 97.273,82.297 97.273,79.936 98.21,78.999 99.446,78.999 100.735,77.709 U6.8
OSC_IN: C10.2 U1.5 Y1.1 | length 12
  Top Layer w0.254: C10.2 84.477,85.682 Y1.1 85.905,87.11 U1.5
OSC_OUT: C11.2 U1.6 Y1.2 | length 15.8
  Top Layer w0.254: C11.2@82.067,79.9 83.595,79.9 Y1.2 85.496,84.557 87.55,86.61 U1.6
PA0: P8.5 U1.10 | length 45
  Top Layer w0.254: v1(86.843,82.372) 86.843,83.21 88.242,84.61 U1.10 ; v1(108.509,76.327) 110.82,76.327 112.573,74.574 115.815,74.574 117.673,72.716 P8.5
  Bottom Layer w0.254: v1(86.843,82.372) 86.868,82.347 86.868,80.785 91.365,76.289 108.471,76.289 v1(108.509,76.327)
PA12: P8.4 U1.33 | length 28.6
  Top Layer w0.254: U1.33 108.455,87.61 116.021,80.044 116.021,78.455 120.596,73.88 P8.4
PB3: P9.5 U1.39 | length 52.5
  Top Layer w0.254: U1.39 99.286,92.453 99.674,92.841 107.573,92.841 109.122,94.39 109.122,105.82 110.243,106.941 113.453,106.941 116.021,109.509 116.021,111.306 116.594,111.879 118.372,111.879 126.306,119.813 126.306,122.477 126.306,123.08 P9.5
PB4: P9.4 U1.40 | length 50.1
  Top Layer w0.254: U1.40 98.786,92.588 99.445,93.247 107.294,93.247 108.716,94.67 108.716,106.252 109.855,107.391 113.03,107.391 115.614,109.975 115.614,111.474 116.426,112.286 118.204,112.286 124.51,118.591 124.51,121.284 P9.4
PB5: P9.3 U1.41 | length 47.3
  Top Layer w0.254: U1.41 98.286,92.673 99.267,93.654 107.04,93.654 108.31,94.924 108.31,106.735 109.55,107.975 112.636,107.975 115.087,110.427 115.087,111.522 118.888,115.322 120.004,115.322 122.713,118.032 122.713,119.488 P9.3
PWM1: Q1.1 R6.1 U1.29 | length 62.7
  Top Layer w0.254: Q1.1 66.584,62.193 R6.1 66.584,64.992 74.613,73.021 74.613,72.988 74.6,72.974 v1(74.549,72.974) ; v1(84.658,76.856) 85.264,76.856 88.722,80.315 92.05,80.315 v1(92.532,80.797) ; U1.29 106.77,85.61 107.975,84.404 107.975,83.591 106.684,82.3 104.322,82.3 v1(103.302,81.28)
  Bottom Layer w0.254: v1(74.549,72.974) 74.6,72.974 78.482,76.856 v1(84.658,76.856) ; v1(92.532,80.797) 92.786,81.051 103.099,81.051 103.302,81.255 v1(103.302,81.28)
PWM2: Q2.1 R7.1 U1.30 | length 44.2
  Top Layer w0.254: U1.30 109.38,86.11 115.614,79.876 115.614,78.287 120.091,73.81 120.091,72.314 119.278,71.501 119.278,70.782 122.217,67.843 122.961,67.843 123.749,68.631 124.993,68.631 128.815,64.809 128.815,64.044 Q2.1
PWM3: Q3.1 R8.1 U1.31 | length 57.5
  Top Layer w0.254: U1.31 106.447,86.61 v1(106.629,86.792) ; v1(126.39,126.441) 128.4,126.441 R8.1 128.488,126.783 Q3.1
  Bottom Layer w0.254: v1(106.629,86.792) 111.862,92.024 111.862,111.912 v1(126.39,126.441)
PWM4: Q4.1 R9.1 U1.32 | length 62.5
  Top Layer w0.254: Q4.1 65.241,124.424 R9.1 66.246,123.673 v1(67.005,123.673) ; v1(89.129,101.829) 89.129,100.305 90.403,99.03 90.403,94.597 90.483,94.517 v1(90.526,94.517) ; v1(98.196,87.147) 98.234,87.11 U1.32
  Bottom Layer w0.254: v1(67.005,123.673) 67.107,123.774 68.834,123.774 89.154,103.454 89.154,101.854 v1(89.129,101.829) ; v1(90.526,94.517) 91.389,93.654 91.389,89.016 92.344,88.062 94.961,88.062 95.876,87.147 v1(98.196,87.147) ; v1(89.129,101.829) 89.129,101.575 v1(89.129,101.829)
RST: C9.2 K1.2 K1.3 P6.3 R11.1 U1.7 | length 74.6
  Top Layer w0.254: U1.7 95.178,86.11 v1(95.199,86.131) 95.25,86.081 v1(98.374,86.081) ; P6.3@101.6,113.284 101.93,112.954 102.831,112.954 105.05,110.735 v1(105.05,94.64) ; v1(104.775,78.638) 105.766,79.629 K1.2 107.747,80.01 109.093,81.356 112.522,81.356 113.309,80.569 113.309,79.392 C9.2 112.293,76.878 R11.1 ; v1(105.689,77.318) 105.74,77.318 105.766,77.292 K1.3
  Bottom Layer w0.254: v1(95.199,86.131) 95.742,86.131 96.834,85.039 100.317,85.039 105.689,79.666 v1(105.689,77.318) 104.775,78.232 v1(104.775,78.638) ; v1(98.374,86.081) 98.39,86.097 103.115,86.097 105.05,88.032 v1(105.05,94.64)
SCL: R15.2 U1.42 U2.23 | length 24
  Top Layer w0.254: v1(96.926,103.632) 96.825,103.53 96.825,98.474 97.4,97.899 ; 97.402,97.899 97.786,97.515 U1.42 ; U2.23 v1@99.834,103.722 ; v1(99.834,103.734) 99.834,106.608 R15.2
  Bottom Layer w0.254: v1(96.926,103.632) 96.926,103.657 97.003,103.734 v1@99.822,103.734
SDA: R14.2 U1.43 U2.24 | length 23.7
  Top Layer w0.254: U1.43 97.286,97.438 96.295,98.429 96.295,103.877 96.822,104.403 99.305,104.403 ; U2.24 99.305,101.997 99.305,104.403 ; R14.2 99.305,108.415 99.305,104.403
SPI1_MISO: U1.16 U6.7 | length 10.2
  Top Layer w0.254: U1.16 96.286,79.406 97.321,78.371 97.321,77.025 97.866,76.479 99.778,76.479 U6.7
SPI1_MOSI: U1.17 U6.6 | length 5.3
  Top Layer w0.254: U1.17 96.786,79.848 98.548,78.086 U6.6
SPI1_SCK: U1.15 U6.5 | length 10.2
  Top Layer w0.254: U1.15 95.786,79.403 94.717,78.334 94.717,77.14 95.479,76.378 96.749,76.378 97.917,75.209 U6.5
SPPLED: R31.2 U5.24 | length 24
  Top Layer w0.254: v1(110.617,96.418) 109.83,95.631 109.83,93.447 112.75,90.526 112.75,85.707 R31.2
  Bottom Layer w0.254: U5.24 109.677,100.876 110.715,99.838 110.715,96.516 v1(110.617,96.418)
SWCLK: P6.5 U1.37 | length 28.5
  Top Layer w0.254: U1.37 100.286,91.472 100.838,92.024 106.502,92.024 v1(106.629,92.151) ; v1(106.68,95.529) P6.5@106.68,112.954
  Bottom Layer w0.254: v1(106.629,92.151) 106.68,92.202 106.68,94.527 106.659,94.548 106.659,95.508 v1(106.68,95.529)
SWDIO: P6.4 U1.34 | length 31.5
  Top Layer w0.254: U1.34 106.119,88.11 107.188,89.179 v1(107.188,90.729) ; P6.4@104.394,113.03 105.613,111.811 105.613,95.655 106.501,94.767 v1(107.188,94.767)
  Bottom Layer w0.254: v1(107.188,90.729) v1(107.188,94.767)
USART2_RX: U1.13 U5.1 | length 31.4
  Top Layer w0.254: v1(94.132,79.68) 94.786,80.333 U1.13 ; v1(104.521,79.451) 104.521,80.721 105.287,81.487 107.421,81.487 v1(109.957,84.023)
  Bottom Layer w0.254: v1(94.132,79.68) 94.61,80.158 98.887,80.158 99.568,79.477 104.496,79.477 v1(104.521,79.451) ; v1(109.957,84.023) 111.176,85.242 116.118,85.242 117.856,86.981 U5.1
USART2_TX: U1.12 U5.2 | length 29.9
  Top Layer w0.254: v1(93.299,80.208) 93.486,80.394 U1.12 ; v1(103.911,80.543) 103.911,80.975 104.83,81.894 106.913,81.894 109.423,84.404 v1(109.423,84.811)
  Bottom Layer w0.254: v1(93.299,80.208) 93.656,80.564 v1@103.815,80.564 ; v1(109.423,84.811) 111.989,87.376 U5.2
USART3_RX: P7.3 U1.22 | length 28
  Top Layer w0.254: P7.3 80.608,89.916 82.271,88.252 v1@82.334,88.252 ; U1.22 99.286,84.224 v1(99.314,84.252)
  Bottom Layer w0.254: v1(82.398,88.316) 82.398,87.699 86.205,83.892 86.542,83.892 87.702,82.732 97.794,82.732 v1(99.314,84.252)
USART3_TX: P7.4 U1.21 | length 26.2
  Top Layer w0.254: P7.4 77.241,87.401 83.109,87.401 83.312,87.605 v1(83.312,87.681) ; v1(98.273,84.379) 98.425,84.379 98.785,84.019 U1.21 U1.21
  Bottom Layer w0.254: v1(83.312,87.681) 83.312,87.36 86.373,84.299 86.72,84.299 87.88,83.138 96.956,83.138 98.196,84.379 v1(98.273,84.379)
VBAT: C1.1 L1.1 P1.1 P2.1 P3.1 P4.1 R3.1 R4.2 S1.2 U3.5 | length 259.6
  Top Layer w0.3: R4.2@91.394,100.546 91.394,100.97 91.902,101.478 93.248,101.478 94.259,102.489 94.259,106.401 93.65,107.01 S1.2
  Top Layer w0.8: U3.5 84.709,108.661 86.292,110.244 R3.1
  Top Layer w1: L1.1 87.519,110.253 R3.1 88.613,110.244 89.002,109.855 89.002,108.941 90.932,107.01 S1.2 ; C1.1 87.816,107.01 S1.2@91.787,107.01
  Bottom Layer w1: P1.1 58.42,60.63 75.538,77.748 80.35,77.748 80.594,77.992 80.594,89.535 81.546,90.487 82.67,90.487 83.579,91.396 83.579,92.901 90.138,99.459 90.138,105.835 91.313,107.01 S1.2 ; P4.1 61.697,132.817 63.678,132.817 81.712,114.783 95.275,114.783 ; 80.594,77.748 80.605,77.759 88.476,77.759 93.007,73.228 112.192,73.228 129.053,56.367 133.075,56.367 P2.1 ; S1.2@92.405,107.036 S1.2 ; P3.1 135.661,130.581 135.661,131.498 133.913,133.246 131.291,133.246 112.827,114.783 95.275,114.783 ; S1.2 94.59,107.01 94.996,107.417 94.996,114.503 95.275,114.783
VBAT_DET: C8.2 R4.1 R5.2 U1.11 | length 25.5
  Top Layer w0.254: v1(90.424,84.074) 93.45,84.074 U1.11 ; v1(90.562,93.356) 90.562,93.42 90.639,93.497 92.126,93.497 94.64,96.012 94.64,98.146 94.023,98.763 C8.2@93.193,98.763 ; R5.2@91.389,98.687 93.116,98.687 C8.2@93.193,98.763 ; R4.1@93.074,100.432 93.074,98.882 C8.2@93.193,98.763
  Bottom Layer w0.254: v1(90.424,84.074) 89.869,84.629 89.869,90.717 90.562,91.409 v1(90.562,93.356)
VBATIN: P0.1 S1.1 | length 6
  Top Layer w1: P0.1 90.932,111.912 90.528,111.509 90.528,109.827 91.567,108.788 S1.1
VCC3V3: C14.2 C15.2 C18.2 C19.2 C98.1 C99.1 P5.3 P6.1 P7.1 P8.1 P9.1 R11.2 R14.1 R15.1 R18.2 R20.2 R21.2 R22.2 R23.2 R24.2 R25.2 R26.2 R27.2 R28.2 R29.2 U1.1 U1.9 U1.24 U1.36 U1.48 U2.8 U2.13 U5.12 U6.2 | length 318.6
  Top Layer w0.254: R28.2 65.467,130.189 R27.2 ; R28.2@61.149,125.871 70.671,116.349 70.671,113.022 72.72,110.973 72.72,108.626 75.792,105.554 75.792,99.206 77.216,97.782 P7.1 78.054,94.996 78.578,94.472 83.041,94.472 C19.2 84.407,93.693 84.912,93.187 84.912,92.177 85.192,91.897 89.256,91.897 90.167,92.809 92.707,92.809 v1(92.964,93.066) ; R21.2 61.428,62.647 61.428,61.996 64.867,58.558 65.924,58.558 70.576,63.21 P5.3 ; v1(81.509,75.336) 81.534,75.311 81.559,75.311 81.636,75.387 85.915,75.387 87.32,76.792 C98.1 88.141,76.872 C99.1 90.842,76.872 v1(91.694,77.724) ; v1(89.179,83.896) 89.84,83.236 v1(89.84,80.975) ; v1(90.424,85.141) 93.455,85.141 U1.9 ; v1(90.83,90.526) 90.83,90.576 90.953,90.699 93.388,90.699 v1(93.486,90.602) ; U1.1 v1(93.486,90.602) ; U1.48 94.594,90.602 v1(93.486,90.602) ; P6.1@96.52,113.284 99.763,110.041 101.727,110.041 R15.1 102.227,110.066 v1(102.972,109.322) ; U2.8 99.834,95.06 v1(99.847,95.047) 100.787,94.107 103.607,94.107 104.521,95.021 v1(104.521,97.13) 104.521,97.993 104.196,98.318 U2.13 ; U1.24 103.757,82.31 104.48,83.033 v1(104.597,83.033) ; U1.36 102.293,89.11 v1(103.353,90.17) 103.353,90.512 103.87,91.03 v1@105.778,91.03 ; v1(107.442,98.781) 107.903,99.242 107.903,108.411 107.929,108.437 112.196,108.437 v1(113.106,109.347) 113.792,110.033 R20.2 ; R29.2 R20.2 ; v1(113.944,84.43) 113.513,84.861 113.513,87.056 114.29,87.833 114.29,89.147 114.29,92.833 C18.2 114.29,94.111 114.29,101.906 113.546,102.651 C15.2 113.64,106.172 v1(114.579,107.112) ; v1(114.029,79.113) R11.2 114.351,76.683 v1(115.468,75.565) ; P9.1 119.653,116.662 114.681,111.69 114.681,111.371 R20.2 ; v1(126.771,61.925) 129.148,59.549 R23.2 133.136,62.089 R24.2 ; v1(127.076,127.279) 127.076,128.143 R26.2 129.723,129.885 132.461,127.146 132.461,126.394 R25.2
  Bottom Layer w0.254: P5.3 71.343,68.295 72.798,68.295 79.84,75.336 v1(81.509,75.336) ; v1(89.179,83.896) 89.531,83.545 90.643,83.545 90.953,83.855 90.953,84.293 90.424,84.823 v1(90.424,85.141) 90.276,85.289 90.276,90.199 90.602,90.526 v1(90.83,90.526) ; v1(89.84,80.975) 91.719,79.096 91.719,77.749 v1(91.694,77.724) 91.709,77.709 U6.2 ; v1(92.964,93.066) v1@92.964,93.015 ; v1(93.486,90.602) 92.964,91.124 v1@92.964,93.015 ; v1(99.847,95.047) 98.192,95.047 96.16,93.015 v1@92.964,93.015 ; v1(100.838,94.183) 100.838,94.056 103.353,91.542 v1(103.353,90.17) 101.356,88.173 U5.12 ; v1@102.997,109.296 v1(102.972,109.322) 107.061,109.322 107.924,108.458 v1(107.95,108.458) ; v1(104.521,97.13) 105.791,97.13 v1(107.442,98.781) ; v1(104.597,83.033) 104.597,86.512 105.791,87.706 v1(105.791,90.957) ; v1(113.106,109.347) 113.106,108.61 114.579,107.137 v1(114.579,107.112) ; v1(113.944,84.43) 114.029,84.345 v1(114.029,79.113) ; v1(115.468,75.565) 115.468,73.914 123.084,66.299 125.217,66.299 P8.1 126.771,64.745 v1(126.771,61.925) ; P9.1 118.999,117.551 118.999,118.301 127.076,126.378 v1(127.076,127.279)
VCC5V: C2.1 C3.2 C4.2 C5.1 D11.2 R1.2 U4.2 | length 31.2
  Top Layer w0.6: C2.1 75.901,115.048 76.707,115.048 D11.2 ; D11.2@76.758,115.048 76.758,114.325 75.848,113.414 75.848,106.995 77.695,105.148 R1.2 77.757,105.156 C3.2 80.002,105.101 81.057,104.046 84.041,104.046 85.344,102.743 U4.2@85.344,101.5 ; U4.2@85.344,99.1 85.344,96.447 86.36,95.431 86.36,95.363 88.795,95.363 C4.2@88.9,95.258
pads on no net: S1. S1.3 U2.2 U2.3 U2.4 U2.5 U2.6 U2.7 U2.14 U2.15 U2.16 U2.17 U2.19 U2.21 U2.22 U3.6 U5.14 U5.33 U5.34

## Polygon pours and split planes (outlines as drawn)
GND on Top Layer "bt Layer-GND" (solid, remove dead copper, pour order 1000): 74.397,89.332 91.897,89.332 92.456,89.891 95.606,93.04 95.606,117.577 90.373,117.577 84.684,123.266 83.718,124.231 75.032,124.231 65.71,114.91 65.761,114.859 65.761,95.275
DGND on Top Layer "bt Layer-GND" (solid, remove dead copper, pour order 1000): 37.719,152.552 38.43,151.841 156.337,151.841 156.337,41.986 150.165,35.814 148.742,37.236 40.107,37.236
GND on Bottom Layer "bt Layer-GND" (solid, remove dead copper, pour order 1002): 66.726,115.443 68.91,115.443 77.851,124.384 82.601,119.634 89.738,119.634 91.821,119.634 94.894,116.561 95.174,116.281 95.174,94.082 95.174,92.304 91.872,89.002 91.592,88.722 74.346,88.722
DGND on Bottom Layer "bt Layer-GND" (solid, remove dead copper, pour order 1001): 38.659,152.07 154.457,152.07 154.686,151.841 154.686,36.779 38.913,36.779

## Keep-outs
Keep-Out Layer:
  lines w0.2: 48.485,133.495 cw(c50.975,140.113) 45.975,145.113 cw(c50.975,140.113) 57.594,142.601 ; 48.485,133.496 cw(c41.197,115.95) 54.632,129.385 65.239,118.778 cw(c40.49,94.029) 65.239,69.281 54.632,58.674 cw(c41.197,72.109) 48.487,54.563 ; 48.487,54.564 ccw(c50.975,47.946) 45.975,42.946 ccw(c50.975,47.946) 57.593,45.455 ; 57.592,45.456 cw(c75.139,38.168) 61.704,51.603 72.31,62.21 cw(c97.059,37.461) 121.808,62.21 132.414,51.603 cw(c118.979,38.168) 136.525,45.458 ; 57.593,142.601 ccw(c75.139,149.891) 61.704,136.456 72.31,125.849 ccw(c97.059,150.598) 121.808,125.849 132.414,136.456 ccw(c118.979,149.891) 136.526,142.603 ; 136.524,45.457 ccw(c143.143,47.946) 148.143,42.946 ccw(c143.143,47.946) 145.633,54.564 ; 136.525,142.603 cw(c143.143,140.113) 148.143,145.113 cw(c143.143,140.113) 145.631,133.494 ; 145.63,133.496 ccw(c152.92,115.95) 139.485,129.385 128.879,118.778 ccw(c153.627,94.029) 128.879,69.281 139.485,58.674 ccw(c152.92,72.109) 145.632,54.562 ; 136.657,144.941 136.657,144.941
  lines w0.25: 52.615,50.993 cw(c53.467,50.47) 53.998,49.623 ; 52.62,50.989 ccw(c50.978,47.955) 53.995,49.628 ; 52.647,137.087 cw(c50.978,140.106) 54.014,138.468 ; 52.656,137.069 ccw(c53.492,137.617) 54.015,138.47 ; 57.457,133.627 57.461,133.627 ; 140.092,49.592 cw(c140.614,50.444) 141.462,50.976 ; 140.093,49.594 ccw(c143.129,47.955) 141.46,50.974 ; 140.134,138.439 ccw(c140.665,137.592) 141.518,137.069 ; 140.135,138.437 cw(c143.154,140.106) 141.516,137.07

## Other copper
Top Layer:
  rectangle net DGND: 99.746,98.628 101.575,100.533

## Silkscreen, mask and mechanical layers (free items; w line width, h text height)
Top Overlay:
  lines w0.3: 73.787,112.674 74.447,112.674 ; 74.676,84.125 75.844,85.42 ; 74.933,82.244 75.844,85.42 ; 75.641,102.337 75.641,103.149 ; 76.175,83.718 75.844,85.42 ; 86.004,91.821 86.665,91.821 ; 87.452,102.768 88.214,102.768
  text "PB3" at 128.245,122.479 h0.81 r315
  text "PB4" at 126.213,120.599 h0.81 r315
  text "PB5" at 124.511,118.796 h0.81 r315
  text "GND" at 122.834,117.119 h0.81 r315
  text "+" at 90.729,116.053 h1.5 r180
  text "-" at 94.132,115.926 h1.5 r180
  text "CLK" at 108.153,115.519 h1 r180
  text "RST" at 102.946,115.494 h1 r180
  text "DIO" at 105.308,115.494 h1 r180
  text "3V3" at 97.557,115.412 h1 r180
  text "GND" at 100.228,115.412 h1 r180
  text "3V3" at 120.904,115.214 h0.81 r315
  text "3V3" at 73.508,80.899 h1
  text "GND" at 73.482,79.35 h1
  text "3.RX" at 73.33,77.826 h1
  text "3.TX" at 73.406,76.175 h1
  text "PA0" at 120.472,74.041 h0.81 r45
  text "PA12" at 121.996,72.288 h0.81 r45
  text "PB2" at 123.825,70.383 h0.81 r45
  text "GND" at 75.971,69.24 h0.81 r45
  text "GND" at 125.578,68.377 h0.81 r45
  text "3V3" at 127.406,66.446 h0.81 r45
  text "BOOT0" at 73.101,66.319 h0.81 r45
  text "3V3" at 71.222,64.414 h0.81 r45
Bottom Overlay:
  circle w0.5: c94.996,84.455 r0.511
  circle w0.5: c94.996,84.455 r2.297
  lines w0.6: 91.77,101.067 94.996,104.292 ; 98.222,101.067 94.996,104.292 ; 112.014,87.427 115.037,84.404 ; 94.996,104.292 94.996,84.455 95.047,84.404 115.037,84.404 ; 111.989,81.407 112.014,81.432 111.989,81.407 ; 111.989,81.407 114.986,84.404 115.037,84.404
  text "Y" at 90.754,97.003 h3
  text "O" at 89.433,82.982 h3
  text "X" at 108.636,80.162 h3
Top Solder:
  rectangle: 99.72,98.603 101.6,100.559
  lines w0.5: 45.911,51.931 47.57,51.931 ; 45.915,136.127 47.574,136.127 ; 47.57,50.364 47.57,51.931 ; 47.574,137.694 47.574,136.127 ; 48.973,137.344 55.55,132.918 ; 49.41,51.034 55.728,55.347 ; 53.842,46.026 58.268,52.603 ; 53.981,141.776 58.293,135.458 ; 54.527,44.106 cw(c50.978,47.955) 47.57,51.931 ; 54.531,143.952 ccw(c50.982,140.103) 47.574,136.127 ; 135.915,52.553 140.228,46.235 ; 135.966,135.56 140.392,142.137 ; 138.506,132.817 144.824,137.129 ; 138.659,55.093 145.236,50.667 ; 139.576,44.109 ccw(c143.125,47.959) 146.533,51.935 ; 139.601,143.944 cw(c143.15,140.094) 146.558,136.119 ; 146.533,50.368 146.533,51.935 ; 146.558,137.685 146.558,136.119 ; 148.192,51.935 146.533,51.935 ; 148.217,136.119 146.558,136.119
  lines w1: 49.928,50.684 55.542,54.469 ; 50.114,137.439 55.22,133.833 ; 50.444,49.86 56.058,53.645 ; 50.521,138.303 55.626,134.696 ; 50.825,138.938 55.931,135.331 ; 50.902,49.098 56.515,52.883 ; 52.045,140.284 55.829,134.671 ; 52.248,47.879 55.855,52.984 ; 52.807,140.741 56.591,135.128 ; 52.883,47.574 56.49,52.68 ; 53.63,141.257 57.415,135.644 ; 53.746,47.168 57.353,52.273 ; 136.793,52.367 140.578,46.753 ; 136.881,135.89 140.487,140.995 ; 137.617,52.883 141.402,47.269 ; 137.719,135.28 143.332,139.065 ; 137.744,135.484 141.351,140.589 ; 138.176,134.518 143.789,138.303 ; 138.278,52.68 143.383,49.073 ; 138.379,53.34 142.164,47.727 ; 138.379,135.179 141.986,140.284 ; 138.582,53.315 143.688,49.708 ; 138.692,133.695 144.305,137.479 ; 138.989,54.178 144.094,50.571

## Text inside footprints (layer, text, board x,y; h text height)
U5: Bottom Overlay "FORBID COPPER" at 120.606,87.876 h1 r270; Bottom Overlay "KEEP OUT" at 122.356,90.376 h1 r270